# Altium PCB Pfe.PcbDoc
Units mil, origin at the board's own origin, x right, y up, seen from the top; angles counter-clockwise.
Board outline 6915 x 6055 mil, 2 copper layers (Top Layer, Bottom Layer); 50 components, 50 nets, 168 pads, 2 vias.
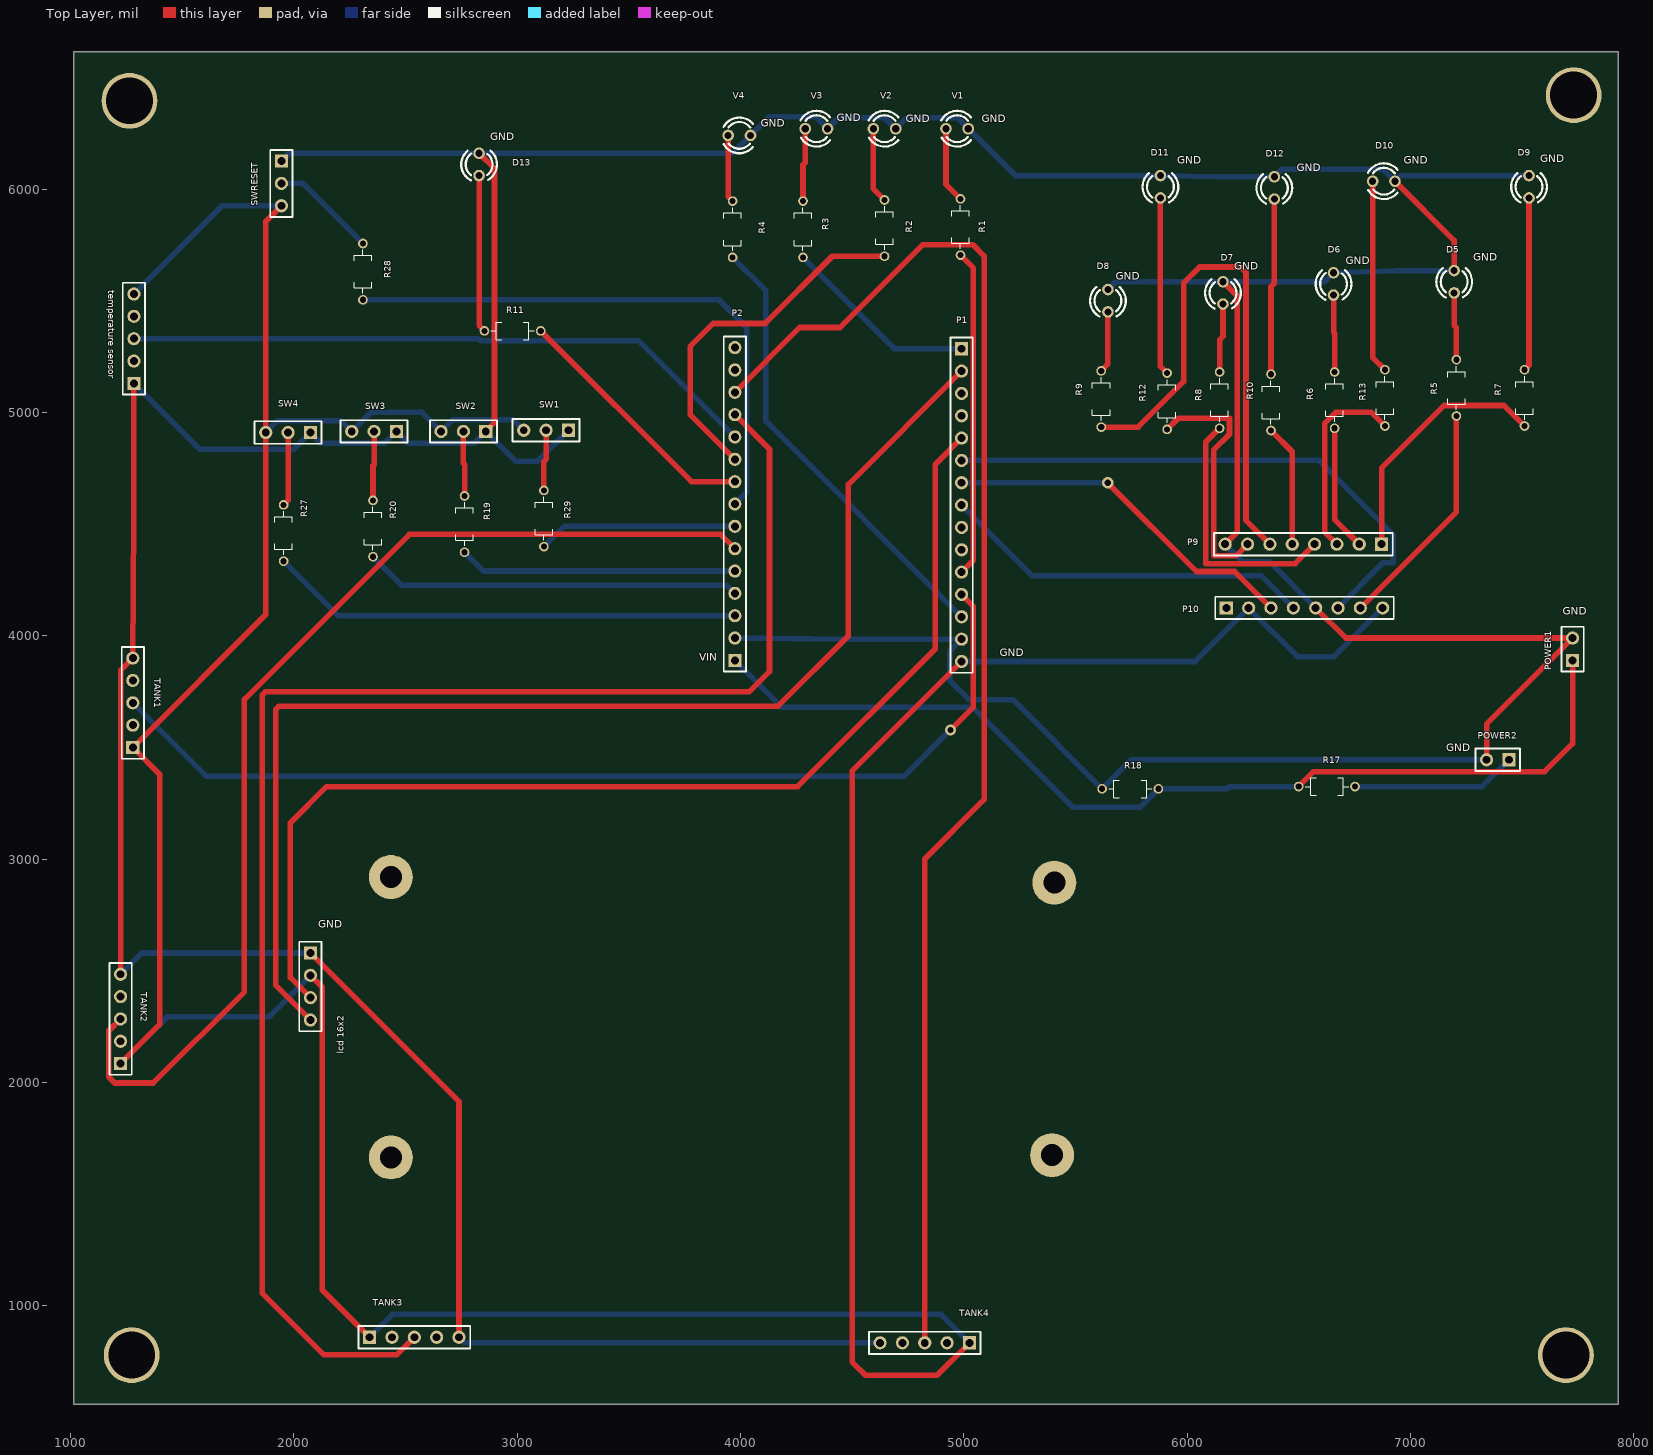
[diagram p0: Top Layer view]
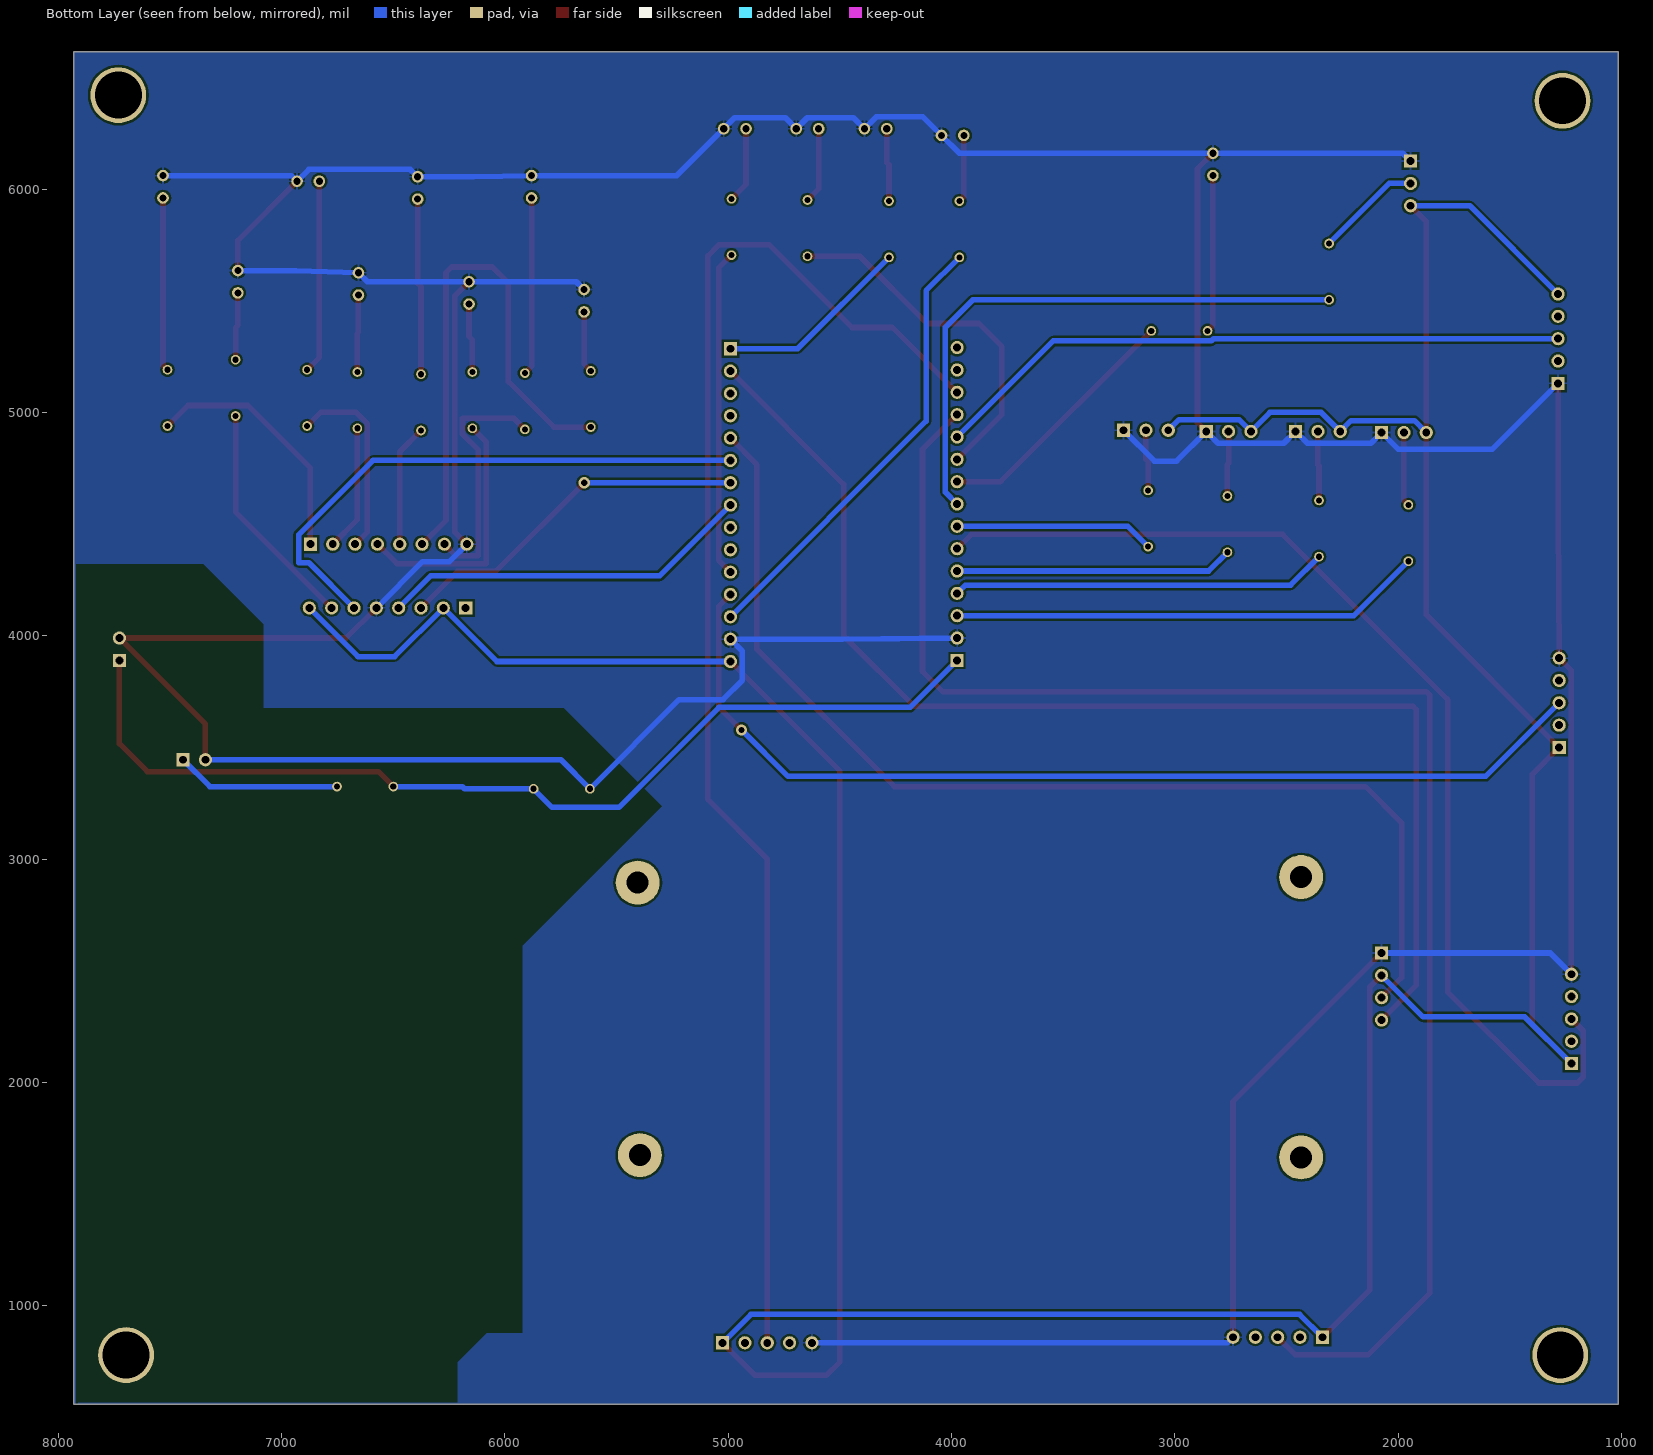
[diagram p1: Bottom Layer view, seen from below]
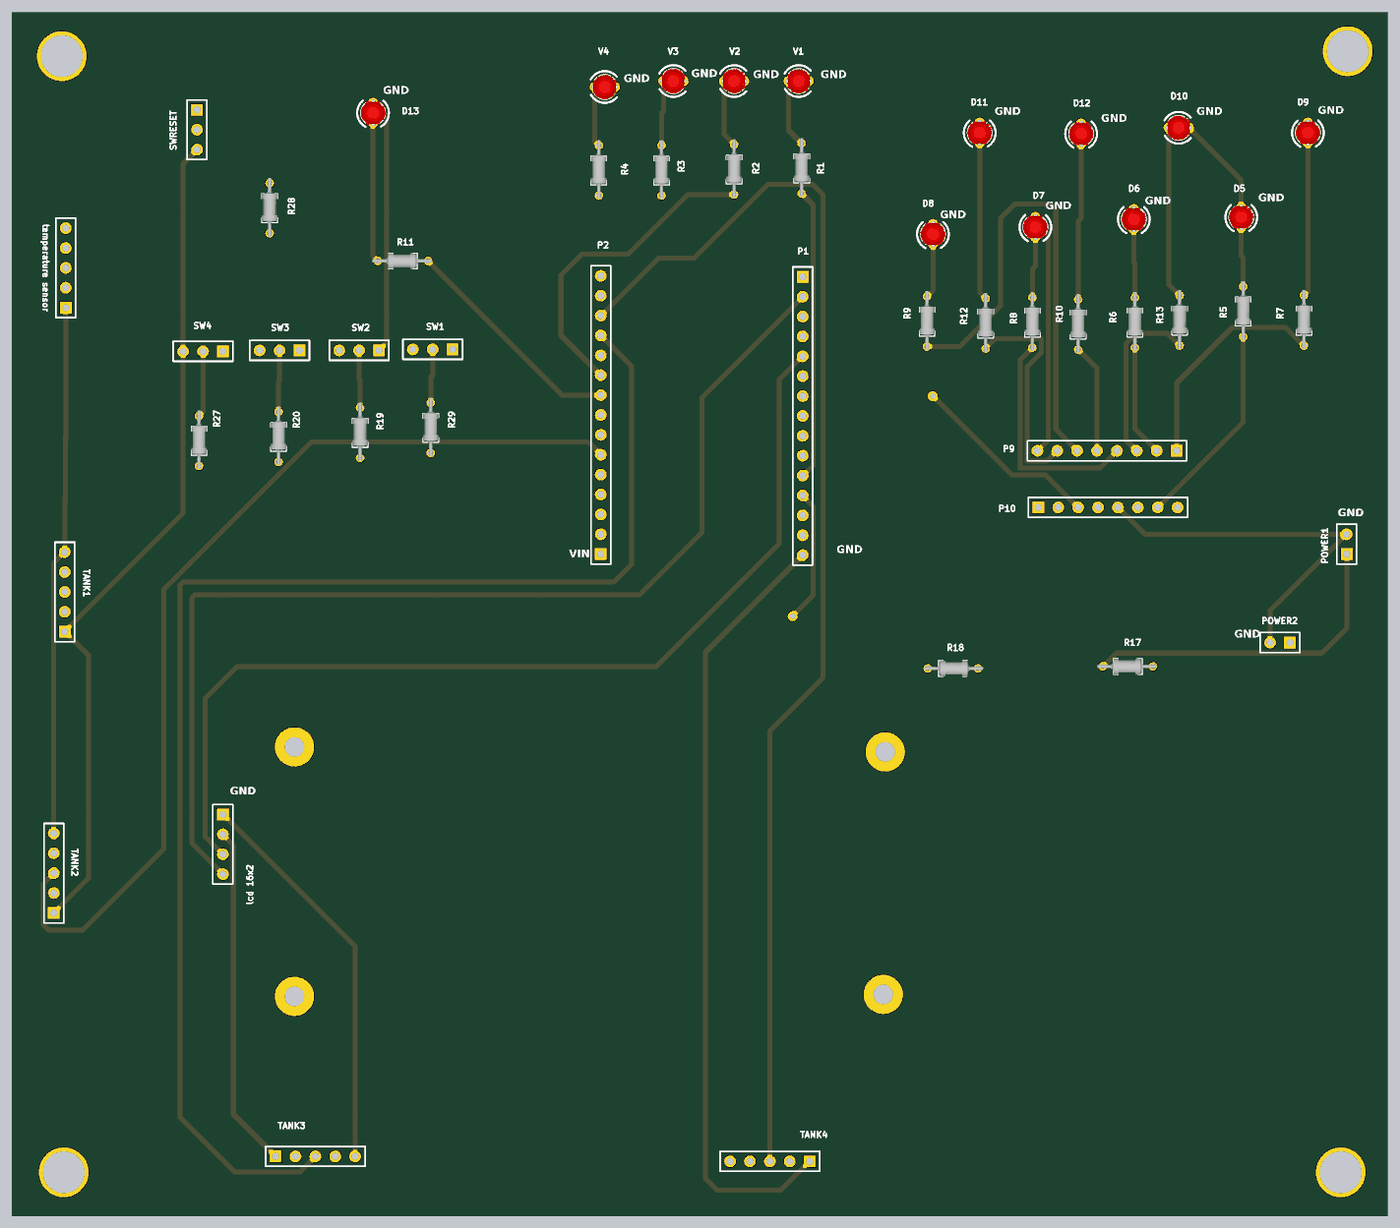
[diagram p2: 3D render of the assembled board from above, using the file's embedded part models]

## Layer stack, top to bottom
Top Solder: solder mask 0.4, Solder Resist, Dk 3.5
Top Layer: signal copper 1.4
Dielectric 1: dielectric 12.6, FR-4, Dk 4.8
Bottom Layer: signal copper 1.4
Bottom Solder: solder mask 0.4, Solder Resist, Dk 3.5

## Board outline
1015,6615 1015,560 7930,560 7930,6615

## Design rules (kind name [scope] priority, off if disabled: settings)
Clearance [All] p1: gap=10 ignorepadtopadclearanceinfootprint=FALSE except(0: Arc-Hole Track-Hole SMDPad-Hole THPad-Hole Via-Hole Fill-Hole Poly-Hole Region-Hole Text-Hole)
HoleSize [All] p1: absolutevalues=TRUE maxlimit=1000 minlimit=1 maxpercent=80.000 minpercent=20.000
PolygonConnect [All] p1: connectstyle=Relief reliefconductorwidth=10 reliefentries=4 polygonreliefangle="90 Angle" airgapwidth=10
RoutingVias [All] p1: holewidth=28 width=50 viastyle="Through Hole" minholewidth=28 minwidth=50 maxholewidth=28 maxwidth=50
SilkToSolderMaskClearance [IsText] p1: minsilkscreentomaskgap=10 clearancetoexposedcopper=TRUE
SolderMaskExpansion [All] p1: expansion=4 istentingtop=FALSE
Width [All] p1: maxlimit=30 minlimit=20 preferedwidth=25
28 further rules are at their usual default settings.

## Components (designator, comment, footprint, x,y, rotation, side; value= is the part's Value field where it differs from the comment)
D5 "" LED3MM 7195,5585 r90 top
D6 "" LED3MM 6655,5575 r90 top
D7 "" LED3MM 6160,5535 r90 top
D8 "" LED3MM 5645,5500 r90 top
D9 "" LED3MM 7530,6010 r90 top
D10 "" LED3MM 6880,6035 r0 top
D11 "" LED3MM 5880,6010 r90 top
D12 "" LED3MM 6390,6005 r90 top
D13 "" LED3MM 2830,6110 r90 top
"lcd 16x2" "lcd 16x2" HDR1X4 2075,2580 r270 top
P1 "right esp32" HDR1X15 4990,5285 r270 top
P2 "lefet esp32" HDR1X15 3975,3890 r90 top
P9 "Routput register" HDR1X8 6870,4410 r180 top
P10 "Loutput register" HDR1X8 6175,4125 r0 top
POWER1 "POWER1" HDR1X2 7725,3890 r90 top
POWER2 "POWER2" HDR1X2 7440,3445 r180 top
R1 "1622194-1" RESAD640W45L370D200 4985,5830 r90 top value=220
R2 "1622194-1" RESAD640W45L370D200 4645,5825 r90 top value=220
R3 "1622194-1" RESAD640W45L370D200 4280,5820 r90 top value=220
R4 "1622194-1" RESAD640W45L370D200 3965,5820 r90 top value=220
R5 "1622194-1" RESAD640W45L370D200 7205,5110 r90 top value=220
R6 "1622194-1" RESAD640W45L370D200 6660,5055 r90 top value=220
R7 "1622194-1" RESAD640W45L370D200 7510,5065 r90 top value=220
R8 "1622194-1" RESAD640W45L370D200 6145,5055 r90 top value=220
R9 "1622194-1" RESAD640W45L370D200 5615,5060 r90 top value=220
R10 "1622194-1" RESAD640W45L370D200 6375,5045 r90 top value=220
R11 "1622194-1" RESAD640W45L370D200 2980,5365 r180 top value=220
R12 "1622194-1" RESAD640W45L370D200 5910,5050 r90 top value=220
R13 "1622194-1" RESAD640W45L370D200 6885,5065 r90 top value=220
R17 "1622194-1" RESAD640W45L370D200 6625,3325 r180 top value=4.7K
R18 "1622194-1" RESAD640W45L370D200 5745,3315 r0 top value=6.8K
R19 "1622194-1" RESAD640W45L370D200 2765,4500 r90 top value=10k
R20 "1622194-1" RESAD640W45L370D200 2355,4480 r90 top value=10K
R27 "1622194-1" RESAD640W45L370D200 1955,4460 r90 top value=10K
R28 "1622194-1" RESAD640W45L370D200 2310,5630 r90 top value=10K
R29 "1622194-1" RESAD640W45L370D200 3120,4525 r90 top value=10K
SW1 "SW1" HDR1X3 3230,4920 r180 top
SW2 "SW2" HDR1X3 2860,4915 r180 top
SW3 "SW3" HDR1X3 2460,4915 r180 top
SW4 "SW4" HDR1X3 2075,4910 r180 top
SWRESET "SWRESET" HDR1X3 1945,6125 r270 top
TANK1 "potentiometer" HDR1X5 1280,3500 r90 top
TANK2 "potentiometer" HDR1X5 1225,2085 r90 top
TANK3 "potentiometer" HDR1X5 2340,860 r0 top
TANK4 "potentiometer" HDR1X5 5025,835 r180 top
"temperature sensor" "potentiometer" HDR1X5 1285,5130 r90 top
V1 "" LED3MM 4970,6270 r0 top (schematic designator D1)
V2 "" LED3MM 4645,6270 r0 top (schematic designator D2)
V3 "" LED3MM 4340,6270 r0 top (schematic designator D3)
V4 "" LED3MM 3995,6240 r0 top (schematic designator D4)

## Footprints (in the part's own frame and the unit in brackets; to place one, negate y for a bottom-side part, rotate by r counter-clockwise, add the part's x,y. Pads: shape width x height; smd on the part's side, far side on the other; paste and mask are expansions set on the pad)
HDR1X2 [mm] "Connector; Header; 2 Position"
  rect 1.5x1.5 hole 0.9: 1(0,0)
  round 1.5 hole 0.9: 2(2.54,0)
  silkscreen extent -1.27,-1.27 3.81,1.27
HDR1X3 [mm] "Connector; Header; 3 Position"
  rect 1.5x1.5 hole 0.9: 1(0,0)
  round 1.5 hole 0.9: 2(2.54,0) 3(5.08,0)
  silkscreen extent -1.27,-1.27 6.35,1.27
HDR1X4 [mm] "Connector; Header; 4 Position"
  rect 1.5x1.5 hole 0.9: 1(0,0)
  round 1.5 hole 0.9: 2(2.54,0) 3(5.08,0) 4(7.62,0)
  silkscreen extent -1.27,-1.27 8.89,1.27
HDR1X5 [mm] "Connector; Header; 5 Position"
  rect 1.5x1.5 hole 0.9: 1(0,0)
  round 1.5 hole 0.9: 2(2.54,0) 3(5.08,0) 4(7.62,0) 5(10.16,0)
  silkscreen extent -1.27,-1.27 11.43,1.27
HDR1X8 [mm] "Connector; Header; 8 Position"
  rect 1.5x1.5 hole 0.9: 1(0,0)
  round 1.5 hole 0.9: 2(2.54,0) 3(5.08,0) 4(7.62,0) 5(10.16,0) 6(12.7,0) 7(15.24,0) 8(17.78,0)
  silkscreen extent -1.27,-1.27 19.05,1.27
HDR1X15 [mm] "Connector; Header; 15 Position"
  rect 1.5x1.5 hole 0.9: 1(0,0)
  round 1.5 hole 0.9: 2(2.54,0) 3(5.08,0) 4(7.62,0) 5(10.16,0) 6(12.7,0) 7(15.24,0) 8(17.78,0) 9(20.32,0) 10(22.86,0) 11(25.4,0) 12(27.94,0) 13(30.48,0) 14(33.02,0) 15(35.56,0)
  silkscreen extent -1.27,-1.27 36.83,1.27
LED3MM [mil]
  round 52 hole 32: A(-50,0) K(50,0)
  silkscreen extent -71,-80 61,80, body extent -60,-62 60,62, height 240
RESAD640W45L370D200 [mm]
  round 1.1 hole 0.7: 1(-3.2,0) 2(3.2,0)
  silkscreen extent -2.47,-1 2.47,1, body extent -3.62,-1 3.88,1, height 1

## Part data
D5 D6 D7 D8 D9 D10 D11 D12 D13 V1 V2 V3 V4: library part TLLR4400, "Red 619nm LED Indication - Discrete 1.9V Radial", Package="Radial Vishay Semiconductor", Availability=Unavailable, MF=Vishay, MP=TLLR4400, Price=None, SnapEDA_Link=https://www.snapeda.com/parts/TLLR4400/Vishay%20Semiconductor%20Opto%20Division/view-part/557946/?ref=snap
"lcd 16x2": library part "Header 4", "Header, 4-Pin", LatestRevisionDate=17-Jul-2002, LatestRevisionNote="Re-released for DXP Platform.", Publisher="Altium Limited"
P1 P2: library part "Header 15", "Header, 15-Pin", LatestRevisionDate=17-Jul-2002, LatestRevisionNote="Re-released for DXP Platform.", Publisher="Altium Limited"
P9 P10: library part "Header 8", "Header, 8-Pin", LatestRevisionDate=17-Jul-2002, LatestRevisionNote="Re-released for DXP Platform.", Publisher="Altium Limited"
POWER1 POWER2: library part "Header 2", "Header, 2-Pin", LatestRevisionDate=17-Jul-2002, LatestRevisionNote="Re-released for DXP Platform.", Publisher="Altium Limited"
R1 R2 R3 R4 R5 R6 R7 R8 R9 R10 R11 R12 R13 R17 R18 R19 R20 R27 R28 R29: "LR0204 1% 220R", Package=None, Availability=Unavailable, MP=1622194-1, Price=None
SW1 SW2 SW3 SW4 SWRESET: library part "Header 3", "Header, 3-Pin", LatestRevisionDate=17-Jul-2002, LatestRevisionNote="Re-released for DXP Platform.", Publisher="Altium Limited"
TANK1 TANK2 TANK3 TANK4 "temperature sensor": library part "Header 5", "Header, 5-Pin", LatestRevisionDate=17-Jul-2002, LatestRevisionNote="Re-released for DXP Platform.", Publisher="Altium Limited"

## Free pads (board coordinates)
  round 250 hole 210: 1(7730,6420) 2(7695,780) 3(1275,780) 4(1265,6395)
  round 197 hole 99: 6(2435,1665) 6(2435,2920) 6(5395,1675) 8(5405,2895)

## Via types
v1: diameter 50, hole 28, Top Layer to Bottom Layer, 2 vias

## Nets (pads, with @x,y where several pads share a name; then routed paths per layer and width w, separated by ;. In a path a pad name is that pad's centre, name@x,y a point inside that pad or via, vN(x,y) a via of type N, cw(c..) or ccw(c..) an arc to the next point about the centre after c; other vN are vias at no path point)
3.3V: "lcd 16x2.2" "temperature sensor.5" P1.15 P10.2 P10.8 SW1.3 SW2.3 SW3.3 SW4.3 SWRESET.3 TANK1.1 TANK2.1 TANK3.1 TANK4.1 | length 18006.5
  Top Layer w25: TANK2.1 1400,2260 1400,3380 TANK1.1 1875,4095 SW4.3 1875,5855 SWRESET.3 ; 2075,2480 2128,2427 2128,1072 TANK3.1 ; P1.15 4500,3395 4500,750 4560,690 4880,690 TANK4.1
  Bottom Layer w25: TANK2.1 1434,2294 1889,2294 2075,2480 ; 1285,5530 1680,5925 SWRESET.3 ; SW4.3 1928,4963 2212,4963 SW3.3 2345,5000 2575,5000 SW2.3 2713,4968 2982,4968 SW1.3 ; TANK3.1 2442,962 4898,962 TANK4.1 ; P1.15 6035,3885 P10.2 6493,3907 6657,3907 P10.8
GND: "lcd 16x2.1" "temperature sensor.1" D5.K D6.K D7.K D8.K D9.K D10.K D11.K D12.K D13.K P1.14 P2.2 P9.8 P10.5 POWER1.2 POWER2.2 R18.1 SW1.1 SW2.1 SW3.1 SW4.1 SWRESET.1 TANK1.5 TANK2.5 TANK3.5 TANK4.5 V1.K V2.K V3.K V4.K | length 26564.5
  Top Layer w25: TANK2.5 1225,3845 TANK1.5 1285,4520 1285,5130 ; 2075,2580 2740,1915 TANK3.5 ; D13.K 2899,6091 2899,4954 SW2.1 ; D7.K 6224.15,5520.85 6224.15,4464.15 P9.8 ; P10.5 6710,3990 POWER1.2 7340,3605 POWER2.2 ; D10.K 7195,5770 D5.K
  Bottom Layer w25: TANK2.5 1320,2580 2075,2580 ; 1285,5130 1579,4836 2001,4836 SW4.1 2123,4862 2407,4862 SW3.1 2513,4862 2807,4862 SW2.1 2993,4782 3092,4782 SW1.1 ; SWRESET.1 1980,6160 D13.K 3965,6160 V4.K 4128,6323 4337,6323 V3.K 4439,6319 4646,6319 V2.K 4744,6319 4971,6319 V1.K 5230,6060 D11.K 6140,6055 D12.K 6423,6088 6877,6088 D10.K 6955,6060 D9.K ; TANK3.5 2765,835 TANK4.5 ; P2.2 4488,3985 P1.14 4937,3932 4937,3800 5022.5,3714.5 5219.52,3714.5 R18.1 5749.02,3445 POWER2.2 ; D8.K 5680,5585 D7.K 6615,5585 D6.K 6935,5635 D5.K ; P9.8 6248,4332 6368,4332 P10.5
GPIO2: P1.12 TANK1.3 | length 4553.6
  Top Layer w25: v1(4940,3578) 4940,3579 5043,3682 5043,4132 P1.12
  Bottom Layer w25: TANK1.3 1609,3371 4732,3371 4939,3578 v1(4940,3578)
GPIO4: P1.11 R1.1 | length 1465
  Top Layer w25: R1.1 5043,5646.02 5043,4338 P1.11
GPIO5: P1.8 P10.4 | length 1675.5
  Bottom Layer w25: P1.8 5307,4268 6332,4268 P10.4
GPIO12: P2.4 R20.1 | length 1687.9
  Bottom Layer w25: R20.1 2482.02,4227 3938,4227 P2.4
GPIO13: P2.3 R27.1 | length 2121.1
  Bottom Layer w25: R27.1 2199.02,4090 P2.3
GPIO14: P2.5 R19.1 | length 1244.8
  Bottom Layer w25: R19.1 2849.02,4290 P2.5
GPIO15: P1.13 R4.1 | length 2033.6
  Bottom Layer w25: R4.1 4114,5545.02 4114,4961 P1.13
GPIO18: P1.7 P10.3 | length 1617
  Top Layer w25: v1(5644.02,4685) 6041.05,4287.97 6212.03,4287.97 P10.3
  Bottom Layer w25: P1.7 v1(5644.02,4685)
GPIO19: P1.6 P10.6 | length 2527.6
  Bottom Layer w25: P1.6 6590,4785 6923,4452 6923,4327 6877,4327 P10.6
GPIO21: "lcd 16x2.3" P1.5 | length 5022.4
  Top Layer w25: 2075,2380 1985,2470 1985,3163 2147,3325 4256,3325 4872,3941 4872,4767 P1.5
GPIO22: "lcd 16x2.4" P1.2 | length 5549.1
  Top Layer w25: 2075,2280 1920,2435 1920,3670.36 1934.64,3685 4168,3685 4483,4000 4483,4678 P1.2
GPIO23: P1.1 R3.1 | length 879.4
  Bottom Layer w25: R3.1 4689.02,5285 P1.1
GPIO25: P2.8 R28.1 | length 2581.9
  Bottom Layer w25: R28.1 3904.98,5504.02 4028,5381 4028,4643 P2.8
GPIO26: P2.7 R29.1 | length 892.7
  Bottom Layer w25: R29.1 3210.98,4490 P2.7
GPIO27: P2.6 TANK2.3 | length 4906.7
  Top Layer w25: TANK2.3 1172,2232 1172,2025 1199,1998 1371,1998 1779,2406 1779,3715 2518,4454 3911,4454 P2.6
GPIO32: P2.10 R2.1 | length 1625.2
  Top Layer w25: P2.10 3775,4990 3775,5295 3878,5398 4110,5398 4411.02,5699.02 R2.1
GPIO33: P2.9 R11.1 | length 1148.6
  Top Layer w25: R11.1 3780.98,4690 P2.9
GPIO34: P2.12 TANK3.3 | length 7033.5
  Top Layer w25: TANK3.3 2461,781 2135,781 1860,1056 1860,3735.36 1874.64,3750 4040,3750 4130,3840 4130,4835 P2.12
GPIO35: "temperature sensor.3" P2.11 | length 2872.3
  Bottom Layer w25: 1285,5330 2827,5330 2837,5320 3545,5320 P2.11
GPIO39: P2.13 TANK4.3 | length 6386.1
  Top Layer w25: P2.13 4265,5380 4446,5380 4817,5751 5040,5751 5091,5700 5091,3267 4825,3001 TANK4.3
MP1: P10.7 R5.1 | length 1037.1
  Top Layer w25: P10.7 7205,4555 R5.1
MP2: P9.2 R6.1 | length 564.6
  Top Layer w25: R6.1 6660,4520 P9.2
MP3: P9.4 R8.1 | length 1154.8
  Top Layer w25: R8.1 6082.97,4866.99 6082.97,4322.97 6482.97,4322.97 P9.4
MP4: P9.6 R9.1 | length 2474
  Top Layer w25: R9.1 5780.02,4934.02 5984,5138 5984,5579 6056,5651 6238,5651 6263,5626 6263,4517 P9.6
MS1: P9.1 R7.1 | length 1135.1
  Top Layer w25: P9.1 6870,4751 7150,5031 7418.02,5031 R7.1
MS2: P9.3 R13.1 | length 878.8
  Top Layer w25: P9.3 6615,4465 6615,4950 6665,5000 6824.02,5000 R13.1
MS3: P9.5 R10.1 | length 548.4
  Top Layer w25: R10.1 6470,4824.02 P9.5
MS4: P9.7 R12.1 | length 1118.9
  Top Layer w25: R12.1 5959.98,4974 6189.15,4974 6189.15,4902.15 6117.97,4830.97 6117.97,4357.97 6217.97,4357.97 P9.7
NetD1_A: R1.2 V1.A | length 340.9
  Top Layer w25: V1.A 4920,6020.98 R1.2
NetD2_A: R2.2 V2.A | length 339.7
  Top Layer w25: V2.A 4595,6000.98 R2.2
NetD3_A: R3.2 V3.A | length 328.2
  Top Layer w25: R3.2 4280,6108 4290,6118 V3.A
NetD4_A: R4.2 V4.A | length 302.3
  Top Layer w25: V4.A 3945,5965.98 R4.2
NetD5_A: D5.A R5.2 | length 303.2
  Top Layer w25: D5.A 7195,5390 7205,5380 R5.2
NetD6_A: D6.A R6.2 | length 346.1
  Top Layer w25: D6.A 6655,5358 6660,5353 R6.2
NetD7_A: D7.A R8.2 | length 310.2
  Top Layer w25: R8.2 6145,5325 6160,5340 D7.A
NetD8_A: D8.A R9.2 | length 276.4
  Top Layer w25: R9.2 5645,5215.98 D8.A
NetD9_A: D9.A R7.2 | length 777.3
  Top Layer w25: R7.2 7530,5210.98 D9.A
NetD10_A: D10.A R13.2 | length 866.8
  Top Layer w25: D10.A 6830,5245.98 R13.2
NetD11_A: D11.A R12.2 | length 796.4
  Top Layer w25: D11.A 5880,5205.98 R12.2
NetD12_A: D12.A R10.2 | length 790.2
  Top Layer w25: R10.2 6375,5563 6390,5578 D12.A
NetD13_A: D13.A R11.2 | length 704.9
  Top Layer w25: D13.A 2830,5389.02 R11.2
NetPOWER2_1: POWER2.1 R17.1 | length 738.7
  Bottom Layer w25: R17.1 7320,3325 POWER2.1
NetR19_2: R19.2 SW2.2 | length 291.1
  Top Layer w25: SW2.2 2760,4772 2765,4767 R19.2
NetR20_2: R20.2 SW3.2 | length 311.1
  Top Layer w25: R20.2 2355,4761 2360,4766 SW3.2
NetR27_2: R27.2 SW4.2 | length 332.3
  Top Layer w25: R27.2 1975,4605.98 SW4.2
NetR28_2: R28.2 SWRESET.2 | length 476.4
  Bottom Layer w25: SWRESET.2 2040.98,6025 R28.2
NetR29_2: R29.2 SW1.2 | length 273.2
  Top Layer w25: R29.2 3120,4780 3130,4790 SW1.2
VIN: P2.1 POWER1.1 R17.2 R18.2 | length 4513.6
  Top Layer w25: R17.2 6566.02,3392 7600,3392 7725,3517 POWER1.1
  Bottom Layer w25: P2.1 4185.5,3679.5 5041,3679.5 5488.5,3232 5787.98,3232 R18.2 6180,3315 6190,3325 R17.2
pads on no net: "temperature sensor.2" "temperature sensor.4" P1.3 P1.4 P1.9 P1.10 P2.14 P2.15 P10.1 TANK1.2 TANK1.4 TANK2.2 TANK2.4 TANK3.2 TANK3.4 TANK4.2 TANK4.4

## Polygon pours and split planes (outlines as drawn)
GND on Bottom Layer "GND_L02_P000" (solid, pour order 0): 1015,6615 1015,560 7930,560 7930,6615

## Other copper
Bottom Layer:
  pour cut-out: 7920,4322.5 7350,4322.5 7080,4052.5 7080,3677.5 5735,3677.5 5295,3237.5 5920,2612.5 5920,877.5 6080,877.5 6210,747.5 6210,567.5 7910,567.5 7920,557.5

## Silkscreen, mask and mechanical layers (free items; w line width, h text height)
Top Overlay:
  text "GND" at 4430,6290.5 h60
  text "GND" at 4740,6285.5 h60
  text "GND" at 5080,6285.5 h60
  text "GND" at 4090,6265.5 h60
  text "GND" at 2880,6205.5 h60
  text "GND" at 7580,6105.5 h60
  text "GND" at 5955,6100.5 h60
  text "GND" at 6970,6100.5 h60
  text "GND" at 6490,6065.5 h60
  text "GND" at 7280,5665.5 h60
  text "GND" at 6710,5650.5 h60
  text "GND" at 6210,5625.5 h60
  text "GND" at 5680,5580.5 h60
  text "GND" at 7680,4080.5 h60
  text "GND" at 5160,3895.5 h60
  text "VIN" at 3815,3875 h60
  text "GND" at 7160,3470.5 h60
  text "GND" at 2110,2680.5 h60